# Altium PCB adapter.PcbDoc
Units mil, origin at the board's own origin, x right, y up, seen from the top; angles counter-clockwise.
Board outline 1375 x 745 mil, 2 copper layers (Top Layer, Bottom Layer); 2 components, 4 nets, 8 pads, 7 vias.
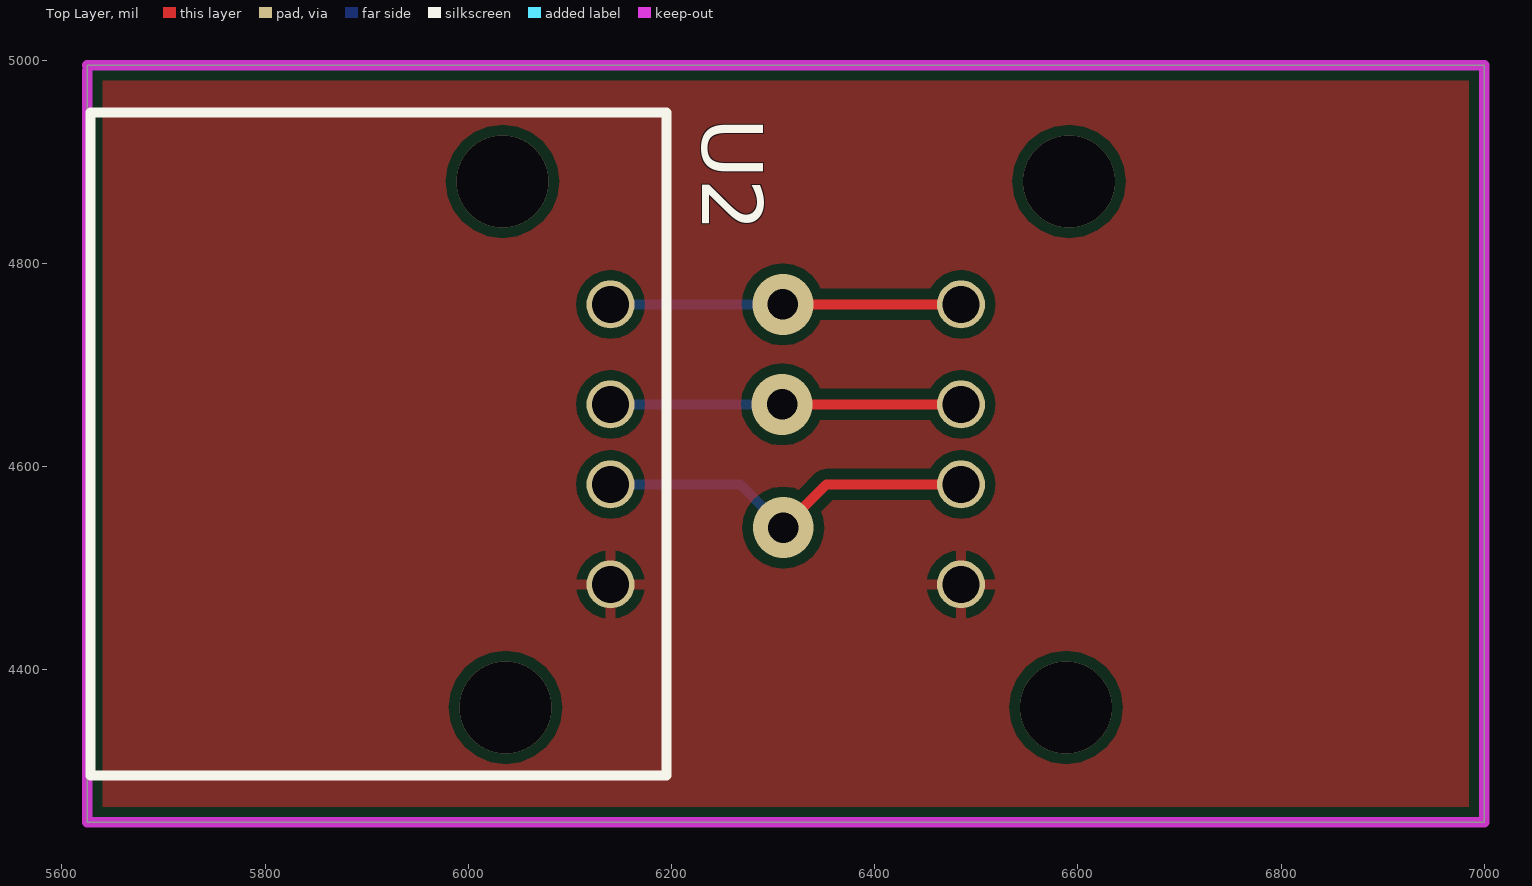
[diagram p0: Top Layer view]
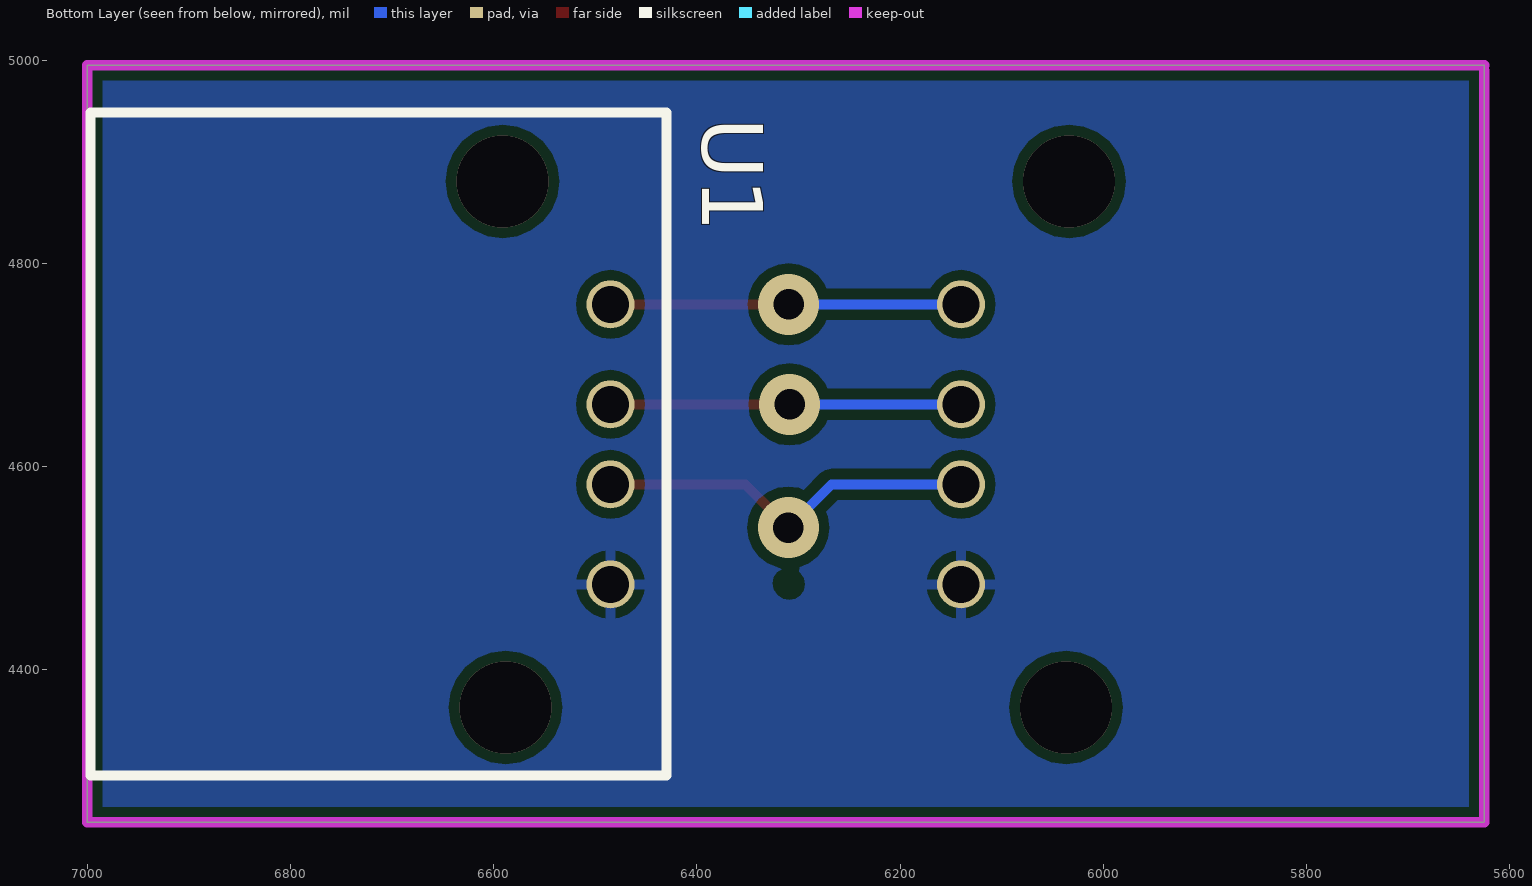
[diagram p1: Bottom Layer view, seen from below]

## Layer stack, top to bottom
Top Layer: signal copper 1.4
Dielectric: dielectric 12.6, FR-4, Dk 4.8
Bottom Layer: signal copper 1.4

## Board outline
5625,4995 5625,4250 7000,4250 7000,4995

## Design rules (kind name [scope] priority, off if disabled: settings)
Clearance [All] p1: gap=10
PolygonConnect [All] p1: connectstyle=Relief reliefconductorwidth=10 reliefentries=4 polygonreliefangle="90 Angle"
RoutingVias [All] p1: holewidth=28 width=50 viastyle="Through Hole" minholewidth=28 minwidth=50 maxholewidth=28 maxwidth=50
SilkscreenOverComponentPads [All] p1: minsilkscreentomaskgap=10
SolderMaskExpansion [All] p1: expansion=4
Width [All] p1: maxlimit=10 minlimit=10 preferedwidth=10
27 further rules are at their usual default settings.

## Components (designator, comment, footprint, x,y, rotation, side; value= is the part's Value field where it differs from the comment)
U1 "USB A RECEPTACLE" "USB A RECEPTACLE THD" 6485,4759.61 r270 bottom
U2 "USB A RECEPTACLE" "USB A RECEPTACLE THD" 6140,4759.61 r270 top

## Footprints (in the part's own frame and the unit in brackets; to place one, negate y for a bottom-side part, rotate by r counter-clockwise, add the part's x,y. Pads: shape width x height; smd on the part's side, far side on the other; paste and mask are expansions set on the pad)
"USB A RECEPTACLE THD" [mm]
  round 1.2 hole 0.92: 1(0,0) 2(2.5,0) 3(4.5,0) 4(7,0)
  silkscreen extent -4.8,-13 11.78,1.4

## Via types
v1: diameter 90.55, hole 90.55, Top Layer to Bottom Layer, 4 vias
v2: diameter 60, hole 30, Top Layer to Bottom Layer, 3 vias

## Nets (pads, with @x,y where several pads share a name; then routed paths per layer and width w, separated by ;. In a path a pad name is that pad's centre, name@x,y a point inside that pad or via, vN(x,y) a via of type N, cw(c..) or ccw(c..) an arc to the next point about the centre after c; other vN are vias at no path point)
D+: U1.3 U2.3 | length 380.2
  Top Layer w10: v2(6310,4540) 6352.44,4582.44 U1.3
  Bottom Layer w10: U2.3 6267.56,4582.44 v2(6310,4540)
D-: U1.2 U2.2 | length 346.7
  Top Layer w10: v2(6308.82,4661.18) U1.2
  Bottom Layer w10: U2.2 v2(6308.82,4661.18) v2@6310,4660
GND: U1.4 U2.4 | length 1.4
  Top Layer w10: U1.4@6484.02,4485 U1.4
VUSB: U1.1 U2.1 | length 345.6
  Top Layer w10: v2(6309.61,4759.61) U1.1
  Bottom Layer w10: U2.1 v2(6309.61,4759.61) v2@6310,4760
copper on no net:
  other v1: 6036.65,4362.95 6588.35,4362.95 6033.7,4880.67 6591.3,4880.67

## Polygon pours and split planes (outlines as drawn)
GND on Keep-Out Layer "GND_PLANE" (solid, remove dead copper): 5625,4995 7000,4995 7000,4250 5625,4250
GND on Top Layer "GND_PLANE" (solid, remove dead copper, pour order 3): 5625,4990 5630,4995 6990,4995 6990,4260 7000,4250 5625,4250
GND on Bottom Layer "GND_PLANE" (solid, remove dead copper, pour order 3): 5625,4990 5630,4995 6990,4995 6990,4260 7000,4250 5625,4250

## Keep-outs
Keep-Out Layer:
  lines w10: 5625,4990 5625,4250 7000,4250 7000,4995 5625,4995

## Dimensions
7000,4250 to 7000,4995 on Keep-Out Layer
7000,4995 to 5625,4995 on Keep-Out Layer